# Altium PCB IOEX V1R0.PcbDoc
Units mm, origin at the board's own origin, x right, y up, seen from the top; angles counter-clockwise.
Board outline 65 x 85 mm, 2 copper layers (Top Layer, Bottom Layer); 26 components, 34 nets, 198 pads, 0 vias.
Unrouted connection lines stored in the file: 164.
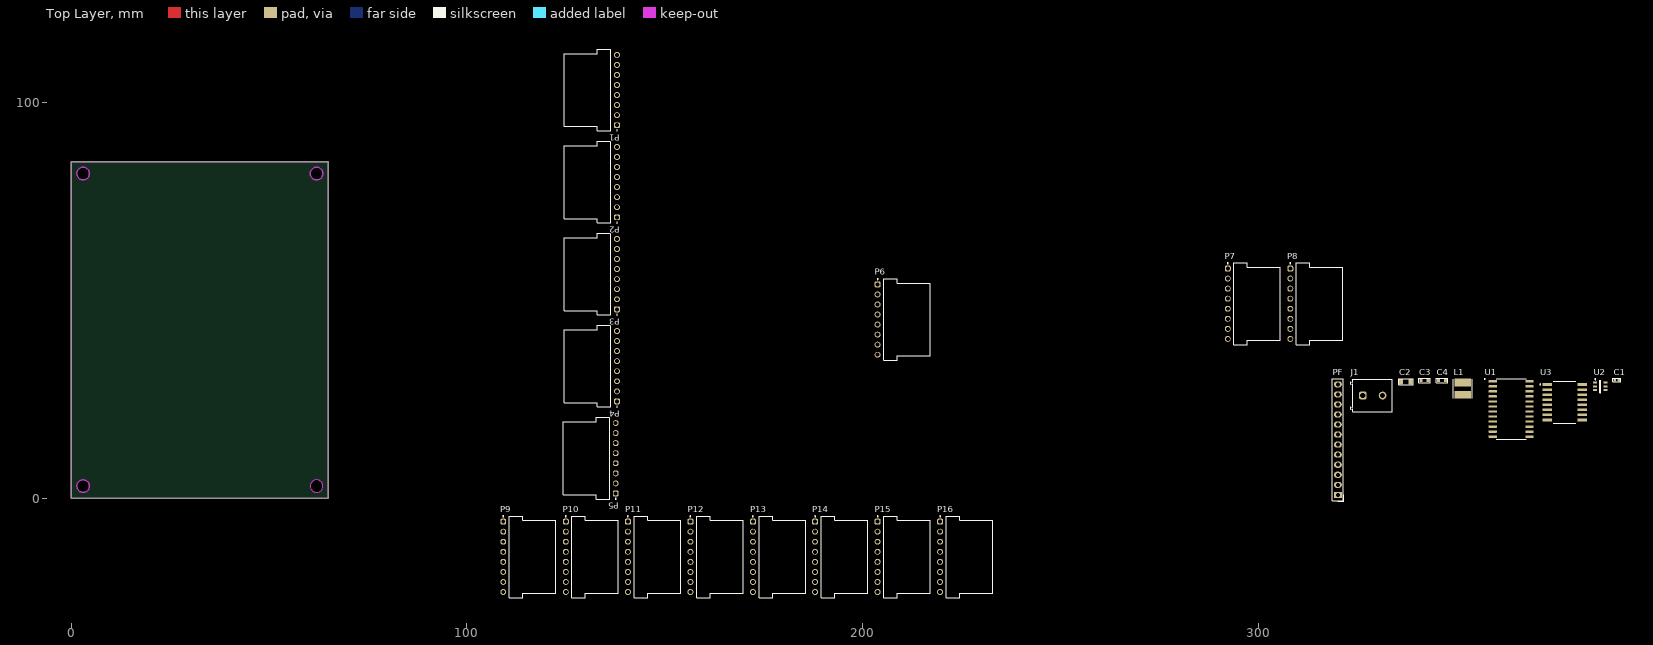
[diagram p0: Top Layer view]
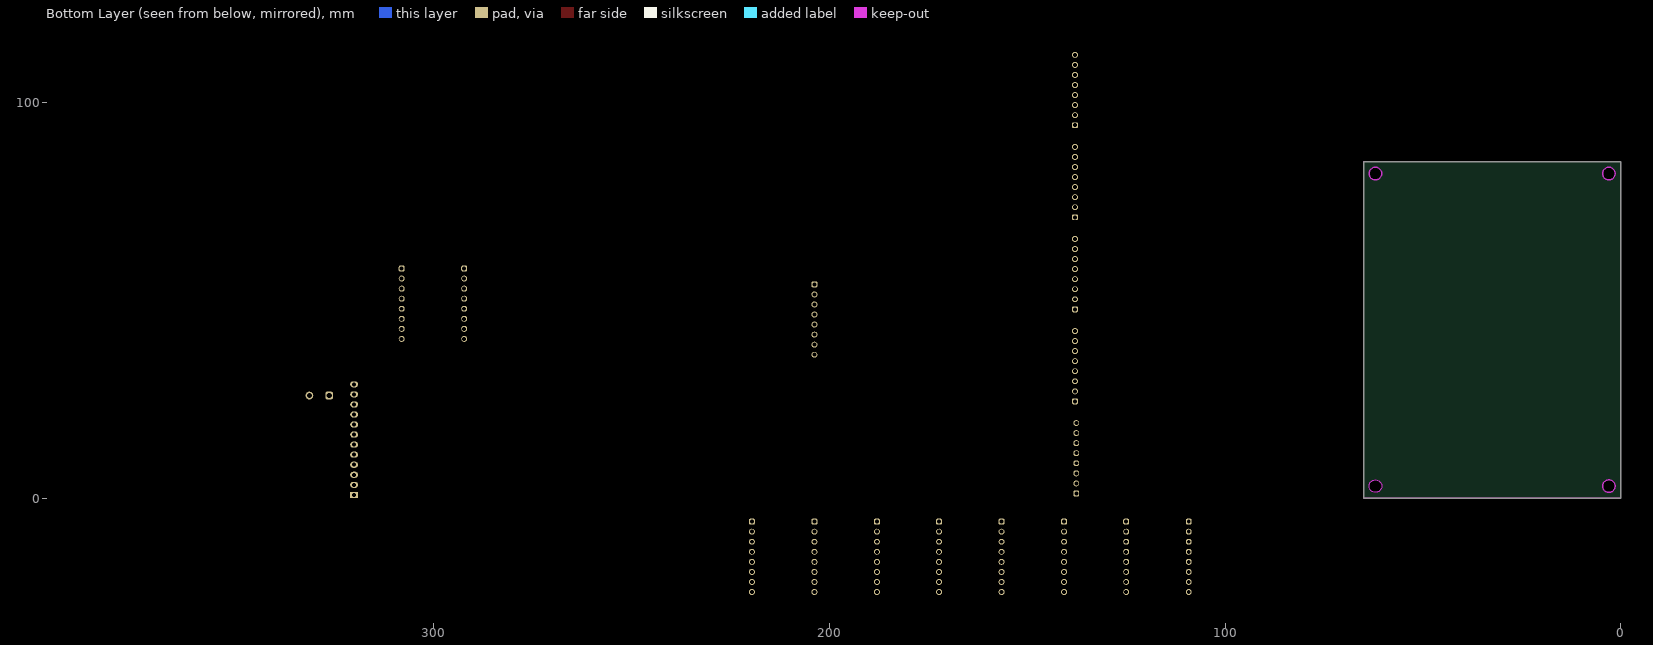
[diagram p1: Bottom Layer view, seen from below]

## Layer stack, top to bottom
Top Solder: solder mask 0.0102, Solder Resist, Dk 3.5
Top Layer: signal copper 0.0356
Dielectric 1: dielectric 0.32, FR-4, Dk 4.8
Bottom Layer: signal copper 0.0356
Bottom Solder: solder mask 0.0102, Solder Resist, Dk 3.5

## Board outline
0,0 0,85 65,85 65,0
cut-out: 62,80.4 cw(c62,82) 60.4,82 cw(c62,82) 62,83.6 cw(c62,82) 63.6,82 cw(c62,82)
cut-out: 3,80.4 cw(c3,82) 1.4,82 cw(c3,82) 3,83.6 cw(c3,82) 4.6,82 cw(c3,82)
cut-out: 60.4,3 ccw(c62,3) 62,1.4 ccw(c62,3) 63.6,3 ccw(c62,3) 62,4.6 ccw(c62,3)
cut-out: 3,1.4 cw(c3,3) 1.4,3 cw(c3,3) 3,4.6 cw(c3,3) 4.6,3 cw(c3,3)

## Design rules (kind name [scope] priority, off if disabled: settings)
Clearance Neutral [InNet('NEUTRAL')] p1: gap=0.8 ignorepadtopadclearanceinfootprint=FALSE
Clearance [All] p2: gap=0.254 ignorepadtopadclearanceinfootprint=FALSE
PolygonConnect [All] p1: connectstyle=Direct reliefconductorwidth=0.254 reliefentries=4 polygonreliefangle="90 Angle" airgapwidth=0.254
RoutingVias [All] p1: holewidth=0.711 width=1.27 viastyle="Through Hole" minholewidth=0.711 minwidth=1.27 maxholewidth=0.711 maxwidth=1.27
SilkToSilkClearance [All] p1: silktosilkclearance=0.01
SilkToSolderMaskClearance [IsPad] p1: minsilkscreentomaskgap=0 clearancetoexposedcopper=TRUE
SolderMaskExpansion [All] p1: expansion=0.102 istentingtop=FALSE
SupplyNets "Schematic Supply Nets_4" [InNet('+3.3V')] p1: voltage=0.000
SupplyNets "Schematic Supply Nets_3" [InNet('+12V')] p2: voltage=0.000
SupplyNets "Schematic Supply Nets_2" [InNet('GND')] p3: voltage=0.000
SupplyNets "Schematic Supply Nets" [InNet('+3V3')] p4: voltage=0.000
Width [All] p1: maxlimit=4 minlimit=0.254 preferedwidth=1 minimp=50.000000 maximp=50.000000 favimp=50.000000
28 further rules are at their usual default settings.

## Components (designator, comment, footprint, x,y, rotation, side; value= is the part's Value field where it differs from the comment)
C1 "0.1µF" 0402-CAP 390.599,29.8 r0 top
C2 "10µF" 0805-CAP 337.299,29.4 r0 top
C3 "22uF" 0603-CAP 341.999,29.7 r0 top
C4 "22uF" 0603-CAP 346.399,29.7 r0 top
J1 "691213710002" 691213710002 328.899,25.9 r0 top
L1 "3.9µH" "IND (4.8 x 4.8)" 351.699,26.1 r90 top
P1 "61900819521" 61900819521 130.5,103.1 r270 top
P2 "61900819521" 61900819521 130.5,79.837 r270 top
P3 "61900819521" 61900819521 130.5,56.575 r270 top
P4 "61900819521" 61900819521 130.5,33.312 r270 top
P5 "61900819521" 61900819521 130.18,10.05 r270 top
P6 "61900819521" 61900819521 211.2,45.1 r90 top
P7 "61900819521" 61900819521 299.699,49.1 r90 top
P8 "61900819521" 61900819521 315.499,49.1 r90 top
P9 "61900819521" 61900819521 116.6,-14.865 r90 top
P10 "61900819521" 61900819521 132.4,-14.865 r90 top
P11 "61900819521" 61900819521 148.1,-14.865 r90 top
P12 "61900819521" 61900819521 163.9,-14.865 r90 top
P13 "61900819521" 61900819521 179.7,-14.865 r90 top
P14 "61900819521" 61900819521 195.4,-14.865 r90 top
P15 "61900819521" 61900819521 211.2,-14.865 r90 top
P16 "61900819521" 61900819521 227,-14.865 r90 top
PF "PH1-12-UA" 2057-PH1-12-UA-ND 320.099,17.3 r90 top
U1 "CD74HC4067" SOIC-24 363.899,22.5 r0 top
U2 "AP63203WU-7" SOT-23-6 386.399,28.2 r0 top
U3 "PCF8574T/3,518" FP-SOT162-1-MFG 377.399,24.2 r0 top

## Footprints (in the part's own frame and the unit in brackets; to place one, negate y for a bottom-side part, rotate by r counter-clockwise, add the part's x,y. Pads: shape width x height; smd on the part's side, far side on the other; paste and mask are expansions set on the pad)
0402-CAP [mm]
  rect 0.635x0.635 smd paste-0.03 mask+0.07: 1(-0.55,0) 2(0.55,0)
  silkscreen extent -0.99,-0.43 0.99,0.43, body extent -0.51,-0.25 0.51,0.25, height 0.51
0603-CAP [mm]
  rect 0.8x0.8 smd paste-0.03 mask+0.07: 1(-0.9,0) 2(0.9,0)
  silkscreen extent -1.47,-0.56 1.47,0.56, body extent -1,-0.39 1,0.39, height 0.79
0805-CAP [mm]
  rect 1x1.35 smd paste-0.03 mask+0.07: 1(-1.2,0) 2(1.2,0)
  silkscreen extent -1.85,-0.8 1.85,0.8, body extent -1.25,-0.62 1.25,0.62, height 0.79
2057-PH1-12-UA-ND [mm] "CONN HEADER 12POS .100 STR TIN"
  rect 1.54x2 hole 1.02: 1(-16.51,0)
  oval 1.54x2 hole 1.02: 2(-13.97,0) 3(-11.43,0) 4(-8.89,0) 5(-6.35,0) 6(-3.81,0) 7(-1.27,0) 8(1.27,0) 9(3.81,0) 10(6.35,0) 11(8.89,0) 12(11.43,0)
  silkscreen extent -18.08,-1.55 12.85,1.45, body extent -17.82,-1.25 12.66,1.25, height 8.52
61900819521 [mm] "2.54mm Male Right Angled Locking Header Top Locking, 8p"
  rrect50% 1.5x1.5 hole 1: 1(8.89,7.42)
  round 1.5 hole 1: 2(6.35,7.42) 3(3.81,7.42) 4(1.27,7.42) 5(-1.27,7.42) 6(-3.81,7.42) 7(-6.35,7.42) 8(-8.89,7.42)
  silkscreen extent -10.31,-5.87 10.34,7.54, body extent -10.16,-5.75 10.16,7.77, height 5.83
691213710002 [mm] "5,00mm - modular - green - Horizontal entry with rising cage clamp -  10,0mm height - 02p"
  rrect50% 1.95x1.95 hole 1.3: 1(-2.5,0)
  round 1.95 hole 1.3: 2(2.5,0)
  silkscreen extent -5.6,-4.15 5,4.15, body extent -5.6,-4.15 5,4.15, height 10.05
FP-SOT162-1-MFG [mm]
  rect 2.4x0.8 smd paste+0 mask+0: 1(-4.4,4.495) 8(-4.4,-4.495) 9(4.4,-4.495) 16(4.4,4.495)
  rect 2.4x0.7 smd paste+0 mask+0: 2(-4.4,3.175) 3(-4.4,1.905) 4(-4.4,0.635) 5(-4.4,-0.635) 6(-4.4,-1.905) 7(-4.4,-3.175) 10(4.4,-3.175) 11(4.4,-1.905) 12(4.4,-0.635) 13(4.4,0.635) 14(4.4,1.905) 15(4.4,3.175)
  silkscreen extent -6.29,-5.25 2.83,5.25, body extent -5.72,-5.95 5.72,5.95, height 0.25
"IND (4.8 x 4.8)" [mm]
  rect 1.98x4.2 smd: 1(0,0) 2(3.097,0)
  silkscreen extent -0.86,-2.4 3.96,2.4, body extent -0.86,-2.4 3.96,2.4, height 2.8
SOIC-24 [mm]
  rrect25% 2.06x0.6 smd: 1(-4.64,6.985) 2(-4.64,5.715) 3(-4.64,4.445) 4(-4.64,3.175) 5(-4.64,1.905) 6(-4.64,0.635) 7(-4.64,-0.635) 8(-4.64,-1.905) 9(-4.64,-3.175) 10(-4.64,-4.445) 11(-4.64,-5.715) 12(-4.64,-6.985) 13(4.64,-6.985) 14(4.64,-5.715) 15(4.64,-4.445) 16(4.64,-3.175) 17(4.64,-1.905) 18(4.64,-0.635) 19(4.64,0.635) 20(4.64,1.905) 21(4.64,3.175) 22(4.64,4.445) 23(4.64,5.715) 24(4.64,6.985)
  silkscreen extent -6.8,-7.7 3.75,7.7, body extent -5.15,-7.7 5.15,7.7, height 2.65
SOT-23-6 [mm] "SOT23,6-Leads, Body 2.9x1.6mm, Pitch 0.95mm, Lead Span 2.7mm, IPC Medium Density"
  rect 1x0.51 smd paste-0.03 mask+0.07: 1(-1.312,0.95) 2(-1.312,0) 3(-1.312,-0.95) 4(1.312,-0.95) 5(1.312,0) 6(1.312,0.95)
  silkscreen extent -1.32,-1.55 0.15,1.97, body extent -1.4,-1.5 1.4,1.5, height 0.86

## Part data
C1: library part GRM155R71E104KE14J, "CAP CER 0.1UF 25V X7R 0402", Capacitance=100nF, Case Code (Imperial)=0402, Case Code (Metric)=1005, Dielectric=X7R, Manufacturer 1=Murata, Max Operating Temperature=125°C, Min Operating Temperature=-55°C, Package Quantity=50000, Supplier Part Number 1=490-14603-1-ND, Tolerance=10%, Voltage Rating=25V, Case/Package=0402, Category="Ceramic Capacitors", ComponentLink1Description=http://www.mouser.com/ds/2/281/c02e-2905.pdf?src-supplier=Mouser, ComponentLink1URL=http://www.mouser.com/ds/2/281/c02e-2905.pdf?src-supplier=Mouser, ComponentLink2Description=http://search.murata.co.jp/Ceramy/image/img/A01X/G101/ENG/GRM155R71E104KE14-01.pdf?src-supplier=Digi-Key, ComponentLink2URL=http://search.murata.co.jp/Ceramy/image/img/A01X/G101/ENG/GRM155R71E104KE14-01.pdf?src-supplier=Digi-Key, Composition=Ceramic, Height=0.5mm, Length=0.039inch, Manufacturer Part Number 1=GRM155R71E104KE14J, Mount="Surface Mount", Packaging="Tape and Reel", Pricing 1="1=0,10000, 10=0,03100, 100=0,01360, 500=0,00974, 1000=0,00765, 2500=0,00696, 5000=0,00640 (USD)", RoHS=Yes, Stock 1=176945, Supplier 1=Digi-Key, Termination=SMD/SMT, Thickness=0.022inch, Voltage Rating (DC)=25V, Weight=0.000212oz, Width=0.5mm
C2: library part GRM21BR61E106KA73K, "CAP CER 10UF 25V X5R 0805", Capacitance=10uF, Case/Package=0805, Dielectric=X5R, Manufacturer=Murata, Max Operating Temperature=85°C, Min Operating Temperature=-55°C, Package Quantity=10000, Supplier Part Number 1=490-16824-1-ND, Tolerance=10%, Voltage Rating=25V, ComponentLink1Description=http://www.mouser.com/ds/2/281/c02e-2905.pdf?src-supplier=Mouser, ComponentLink1URL=http://www.mouser.com/ds/2/281/c02e-2905.pdf?src-supplier=Mouser, ComponentLink2Description=http://search.murata.co.jp/Ceramy/image/img/A01X/G101/ENG/GRM21BR61E106KA73-01.pdf?src-supplier=Digi-Key, ComponentLink2URL=http://search.murata.co.jp/Ceramy/image/img/A01X/G101/ENG/GRM21BR61E106KA73-01.pdf?src-supplier=Digi-Key, ComponentLink3Description=https://search.murata.co.jp/Ceramy/image/img/A01X/G101/ENG/GRM21BR61E106KA73-01.pdf?src-supplier=Digi-Key, ComponentLink3URL=https://search.murata.co.jp/Ceramy/image/img/A01X/G101/ENG/GRM21BR61E106KA73-01.pdf?src-supplier=Digi-Key, Length=0.079inch, Manufacturer Part Number=GRM21BR61E106KA73K, Mount="Surface Mount", Packaging="Tape and Reel", Pricing 1="1 = 0,47000, 10 = 0,32500, 100 = 0,19510, 500 = 0,14630, 1000 = 0,12354, 2500 = 0,11704, 5000 = 0,11054 (USD)", RoHS=Yes, Stock 1=118823, Supplier 1=Digi-Key, Thickness=0.055inch, Voltage Rating (DC)=25V, Weight=0.000335oz, Width=0.049inch
C3 C4: library part GRM188R60J226MEA0D, "CAP CER 22UF 6.3V X5R 0603", Case Code (Imperial)=0603, Case Code (Metric)=1608, Dielectric=X5R, Manufacturer=Murata, Max Operating Temperature=85°C, Min Operating Temperature=-55°C, Package Quantity=4000, Supplier Part Number 1=490-7611-1-ND, Tolerance=20%, Voltage Rating=6.3V, Capacitance=22uF, Case/Package=0603, ComponentLink1Description=https://datasheet.ciiva.com/29540/partnumbering-e-01-29540441.pdf?src-supplier=Digi-Key, ComponentLink1URL=https://datasheet.ciiva.com/29540/partnumbering-e-01-29540441.pdf?src-supplier=Digi-Key, ComponentLink2Description=https://datasheet.ciiva.com/29540/partnumbering-e-01-29540442.pdf?src-supplier=Digi-Key, ComponentLink2URL=https://datasheet.ciiva.com/29540/partnumbering-e-01-29540442.pdf?src-supplier=Digi-Key, ComponentLink3Description=https://datasheet.ciiva.com/29540/partnumbering-e-01-29540443.pdf?src-supplier=Digi-Key, ComponentLink3URL=https://datasheet.ciiva.com/29540/partnumbering-e-01-29540443.pdf?src-supplier=Digi-Key, Depth=0.8mm, Height=0.8mm, Lead Free="Lead Free", Length=1.6mm, Manufacturer Part Number=GRM188R60J226MEA0D, Mount="Surface Mount", Packaging="Tape and Reel", Pricing 1="1=0,28000, 10=0,19400, 100=0,11000, 500=0,07764, 1000=0,06794 (USD)", REACH SVHC="No SVHC", RoHS=Yes, Stock 1=5241613, Supplier 1=Digi-Key, Termination=SMD/SMT, Thickness=0.039inch, Voltage Rating (DC)=6.3V, Weight=0.000222oz, Width=0.8mm
J1: library part CMP-1502-02526-2, Color=Green, Current=10A, Max Operating Temperature=105°C, Min Operating Temperature=-40°C, Voltage=300V, Contact Material=Brass, Contact Plating=Tin, Current Rating=10A, Height=10mm, Housing Material=Nylon, Lead Pitch=5mm, Length=8.3mm, Mount="Through Hole", NexarPartId=8917718, Number of Contacts=2, Number of Levels=1, Number of Pins=2, Number of Positions Per Level=2, Packaging=Box, Pitch=5.0038mm, Plating="Brass, Steel", REACH SVHC=Unknown, RoHS=Compliant, Stripping Length=-7mm, Termination=Screw, Voltage Rating=300V, Width=10.6mm, Wire Gauge (Max)=26AWG, Wire Gauge (Min)=16AWG, Wire/Cable Gauge=26AWG
L1: library part SRR4828A-3R9Y, "FIXED IND 3.9UH 3.4A 47 MOHM SMD", Case/Package=Nonstandard, Current Rating=1.8A, DC Resistance (DCR)=145mR, Inductance=15uH, Manufacturer 1=Bourns, Max Operating Temperature=150°C, Min Operating Temperature=-40°C, Ratings=AEC-Q200, Saturation Current=920mA, Self Resonant Frequency=25MHz, Supplier Part Number 1=SRR4828A-3R9YCT-ND, Test Frequency=100kHz, Tolerance=20%, Category="Fixed Inductors", ComponentLink1Description=http://www.farnell.com/datasheets/2339105.pdf?src-supplier=Farnell, ComponentLink1URL=http://www.farnell.com/datasheets/2339105.pdf?src-supplier=Farnell, ComponentLink2Description=https://www.bourns.com/docs/Product-Datasheets/SRR4828A.pdf?src-supplier=Digi-Key, ComponentLink2URL=https://www.bourns.com/docs/Product-Datasheets/SRR4828A.pdf?src-supplier=Digi-Key, Composition=Wirewound, Core Material=Ferrite, Manufacturer Part Number 1=SRR4828A-3R9Y, Mount="Surface Mount", Packaging="Cut Tape", Pricing 1="1=0,97000, 10=0,84500, 100=0,60380 (USD)", RoHS=No, Shielding=Shielded, Stock 1=1233, Supplier 1=Digi-Key
P1 P2 P3 P4 P5 P6 P7 P8 P9 P10 P11 P12 P13 P14 P15 P16: library part CMP-1502-00604-2, Current Rating=3A, Insulation Resistance=1GΩ, Max Operating Temperature=105°C, Min Operating Temperature=-40°C, Contact Plating=Tin, Gender=Male, Length=20.32mm, NexarPartId=116664062, Number of Pins=8, Pitch=2.54mm, RoHS=Compliant
PF: "CONN HEADER VERT 12POS 2.54MM", Flammability Rating="UL94 V-0", Insulation Color=Black, Manufacturer 1="Adam Equipment", Max Operating Temperature=105°C, Min Operating Temperature=-40°C, Supplier Part Number 1=2057-PH1-12-UA-ND, Voltage Rating (AC)=250V, Category="Headers and Wire Housings", ComponentLink1Description=https://media.digikey.com/pdf/Data%20Sheets/Sullins%20PDFs/Female_Headers.100_DS.pdf?src-supplier=Digi-Key, ComponentLink1URL=https://media.digikey.com/pdf/Data%20Sheets/Sullins%20PDFs/Female_Headers.100_DS.pdf?src-supplier=Digi-Key, ComponentLink2Description=https://datasheet.ciiva.com/16480/page-312-315-16480233.pdf?src-supplier=Future+Electronics, ComponentLink2URL=https://datasheet.ciiva.com/16480/page-312-315-16480233.pdf?src-supplier=Future+Electronics, Connector Type=Header, Contact Finish - Mating=GOLD, Contact Material=Brass, Contact Shape=Square, Contact Type="Male Pin", Fastening Type=Pull, Insulation Material=PBT, Lead Free="Lead Free", Manufacturer Part  1=PH1-12-UA, Mounting Technology="Through Hole", Number of Positions=12, Number of Rows=1, Packaging=Bulk, Pricing 1="1=0,22, 10=0,168, 100=0,128, 500=0,10648, 1000=0,09856, 5000=0,08288, 10000=0,07715 (USD)", RoHS=Yes, Series=PH1, Stock 1=7054, Supplier 1=Digikey, Termination=Solder
U1: "IC MUX/DEMUX 16X1 24SOIC", Case/Package=SOIC, High Level Output Current=25mA, Manufacturer 1="Texas Instruments", Manufacturer Part  1=CD74HCT4067ME4, Max Operating Temperature=125°C, Max Supply Voltage=5.5V, Min Operating Temperature=-55°C, Min Supply Voltage=4.5V, Nominal Supply Current=8uA, Package Quantity=25, -3db Bandwidth=89MHz, Bandwidth=89MHz, Category="Interface ICs", ComponentLink1Description=https://datasheet.ciiva.com/15092/getdatasheetpartid-517315-15092547.pdf?src-supplier=Verical, ComponentLink1URL=https://datasheet.ciiva.com/15092/getdatasheetpartid-517315-15092547.pdf?src-supplier=Verical, ComponentLink2Description=https://datasheet.ciiva.com/6619/cd4514b-6619129.pdf?src-supplier=Digi-Key, ComponentLink2URL=https://datasheet.ciiva.com/6619/cd4514b-6619129.pdf?src-supplier=Digi-Key, ComponentLink3Description=https://datasheet.ciiva.com/6619/cd4514b-6619130.pdf?src-supplier=Digi-Key, ComponentLink3URL=https://datasheet.ciiva.com/6619/cd4514b-6619130.pdf?src-supplier=Digi-Key, ComponentLink4Description=https://datasheet.ciiva.com/6619/cd4514b-6619131.pdf?src-supplier=Digi-Key, ComponentLink4URL=https://datasheet.ciiva.com/6619/cd4514b-6619131.pdf?src-supplier=Digi-Key, ComponentLink5Description=https://datasheet.ciiva.com/14294/cd4515b-mil-14294557.pdf?src-supplier=Avnet, ComponentLink5URL=https://datasheet.ciiva.com/14294/cd4515b-mil-14294557.pdf?src-supplier=Avnet, ComponentLink6Description=https://datasheet.ciiva.com/28433/cd4515b-mil-28433832.pdf?src-supplier=Avnet+Europe, ComponentLink6URL=https://datasheet.ciiva.com/28433/cd4515b-mil-28433832.pdf?src-supplier=Avnet+Europe, ComponentLink7Description=http://components.arrow.com/part/dataview/41680261S405991N2413?src-supplier=Arrow+Electronics, ComponentLink7URL=http://components.arrow.com/part/dataview/41680261S405991N2413?src-supplier=Arrow+Electronics, ComponentLink8Description=http://www.ti.com/general/docs/suppproductinfo.tsp?distId=10&amp;gotoUrl=http%3A%2F%2Fwww.ti.com%2Flit%2Fgpn%2Fcd74hct4067&src-supplier=Digikey, ComponentLink8URL=http://www.ti.com/general/docs/suppproductinfo.tsp?distId=10&amp;gotoUrl=http%3A%2F%2Fwww.ti.com%2Flit%2Fgpn%2Fcd74hct4067&src-supplier=Digikey, ComponentLink9Description=http://www.ti.com/general/docs/lit/getliterature.tsp?genericPartNumber=CD74HCT4067&&fileType=pdf&src-supplier=Avnet, ComponentLink9URL=http://www.ti.com/general/docs/lit/getliterature.tsp?genericPartNumber=CD74HCT4067&&fileType=pdf&src-supplier=Avnet, ComponentLink10Description=http://www.ti.com/lit/gpn/cd74hct4067?src-supplier=Mouser, ComponentLink10URL=http://www.ti.com/lit/gpn/cd74hct4067?src-supplier=Mouser, Contact Plating=Gold, Lead Free="Lead Free", Low Level Output Current=25mA, Mounting Technology="Surface Mount", Number of Bits=16, Number of Channels=1, Number of Circuits=1, Operating Supply Current=8uA, Packaging=Rail/Tube, Pins=24, Pricing 1="1000=0,4986, 2000=0,4936, 3000=0,4887, 4000=0,4838, 5000=0,479, 10000=0,4742, 20000=0,4694, 25000=0,4647, 50000=0,4601 (USD)", Propagation Delay=15ns, RoHS=Yes, RoHS Compliant=Yes, Series=-, Supplier 1="Arrow Electronics", Supplier Part Number 1=CD74HCT4067ME4, Weight=0.022025oz
U2: "IC REG BUCK 3.3V 2A TSOT26", Manufacturer 1=Diodes, Supplier Part Number 1=AP63203WU-7DICT-ND, Manufacturer Part Number 1=AP63203WU-7, Pricing 1="1=0,83000, 10=0,74500, 25=0,70720, 100=0,54290, 250=0,47976, 500=0,45450, 1000=0,35350 (USD)", RoHS=No, Stock 1=11422, Supplier 1=Digi-Key
U3: library part CMP-10112-000010-1, "IC I/O EXPANDER I2C 8B 16SOIC", Ambient Temperature Range High=+85°C, Ambient Temperature Range Low=-40°C, Frequency=100kHz, Manufacturer="NXP Semiconductors", Max Junction Temp=+125°C, Max Supply Voltage=6V, Min Supply Voltage=2.5V, Nominal Supply Current=40uA, Package=SOT162-1, Temperature="-40°C to +85°C", Automotive=No, Category=IC, ComponentLink2Description=Datasheet, ComponentLink2URL=https://www.nxp.com/docs/en/data-sheet/PCF8574_PCF8574A.pdf, Device Class L1="Integrated Circuits (ICs)", Device Class L2="Interface ICs", Device Class L3="I/O Expanders", Digikey Description="IC I/O EXPANDER I2C 8B 16SOIC", Footprint Url=https://www.nxp.com/docs/en/package-information/SOT162-1.pdf, Height=2.65mm, Interface=I2C, Ipc Land Pattern Name=SOIC127P1032X265-16, Lead Free=Yes, Manufacturer Part Number=PCF8574T/3,518, Mouser Description="PCF8574 Series 2.5 - 6V Remote 8-bit I/O Expander for I2C-bus - SOIC-16", Number Of I/Os=8, Octopart=https://octopart.com/pcf8574t%2F3%2C518-nxp+semiconductors-10470852, RoHS=TRUE, Standoff Height=0.1mm, Temperature Range High=+85°C, Temperature Range Low=-40°C

## Nets (pads, with @x,y where several pads share a name; then routed paths per layer and width w, separated by ;. In a path a pad name is that pad's centre, name@x,y a point inside that pad or via, vN(x,y) a via of type N, cw(c..) or ccw(c..) an arc to the next point about the centre after c; other vN are vias at no path point)
+3.3V: C3.1 C4.1 L1.2 U2.1
+3V3: P1.1 P2.1 P3.1 P4.1 P5.1 P6.1 P7.1 P8.1 P9.1 P10.1 P11.1 P12.1 P13.1 P14.1 P15.1 P16.1 PF.11 U1.24 U3.16
+12V: C2.1 J1.2 U2.2 U2.3
GND: C2.2 C3.2 C4.2 J1.1 P1.2 P1.8 P2.2 P2.8 P3.2 P3.8 P4.2 P4.8 P5.2 P5.8 P6.2 P6.8 P7.2 P7.8 P8.2 P8.8 P9.2 P9.8 P10.2 P10.8 P11.2 P11.8 P12.2 P12.8 P13.2 P13.8 P14.2 P14.8 P15.2 P15.8 P16.2 P16.8 PF.12 U1.12 U1.15 U2.4 U3.1 U3.2 U3.3 U3.8
NetC1_1: C1.1 U2.6
NetC1_2: C1.2 L1.1 U2.5
NetP1_3: P1.3 U1.9
NetP1_4: P1.4 P2.4 P3.4 P4.4 P5.4 P6.4 P7.4 P8.4 P9.4 P10.4 P11.4 P12.4 P13.4 P14.4 P15.4 P16.4 PF.3 U3.6
NetP1_5: P1.5 P2.5 P3.5 P4.5 P5.5 P6.5 P7.5 P8.5 P9.5 P10.5 P11.5 P12.5 P13.5 P14.5 P15.5 P16.5 PF.4 U3.7
NetP1_6: P1.6 P2.6 P3.6 P4.6 P5.6 P6.6 P7.6 P8.6 P9.6 P10.6 P11.6 P12.6 P13.6 P14.6 P15.6 P16.6 PF.1 U3.4
NetP1_7: P1.7 P2.7 P3.7 P4.7 P5.7 P6.7 P7.7 P8.7 P9.7 P10.7 P11.7 P12.7 P13.7 P14.7 P15.7 P16.7 PF.2 U3.5
NetP2_3: P2.3 U1.8
NetP3_3: P3.3 U1.7
NetP4_3: P4.3 U1.6
NetP5_3: P5.3 U1.5
NetP6_3: P6.3 U1.4
NetP7_3: P7.3 U1.3
NetP8_3: P8.3 U1.2
NetP9_3: P9.3 U1.23
NetP10_3: P10.3 U1.22
NetP11_3: P11.3 U1.21
NetP12_3: P12.3 U1.20
NetP13_3: P13.3 U1.19
NetP14_3: P14.3 U1.18
NetP15_3: P15.3 U1.17
NetP16_3: P16.3 U1.16
NetPF_5: PF.5 U1.10 U3.9
NetPF_6: PF.6 U1.11 U3.10
NetPF_7: PF.7 U1.14 U3.11
NetPF_8: PF.8 U1.13 U3.12
NetPF_9: PF.9 U1.1
NetPF_10: PF.10 U3.13
NetU3_14: U3.14
NetU3_15: U3.15

## Keep-outs
Keep-Out Layer:
  lines w0.254: 0,0 65,0 65,85 0,85 0,0 ; 1.4,3 cw(c3,3) 3,4.6 cw(c3,3) 4.6,3 cw(c3,3) 3,1.4 cw(c3,3) 1.4,3 ; 1.4,82 cw(c3,82) 3,83.6 cw(c3,82) 4.6,82 cw(c3,82) 3,80.4 cw(c3,82) 1.4,82 ; 60.4,3 cw(c62,3) 62,4.6 cw(c62,3) 63.6,3 cw(c62,3) 62,1.4 cw(c62,3) 60.4,3 ; 60.4,82 cw(c62,82) 62,83.6 cw(c62,82) 63.6,82 cw(c62,82) 62,80.4 cw(c62,82) 60.4,82

## Silkscreen, mask and mechanical layers (free items; w line width, h text height)
Bottom Designator:
  circle w0: c3,3 r1.6
  circle w0: c62,3 r1.6
  circle w0: c62,82 r1.6
  circle w0: c3,82 r1.6
Top Component Outline:
  the board outline again, w0.254